# EAGLE board Audio_Blank (EAGLE 9.1.3)
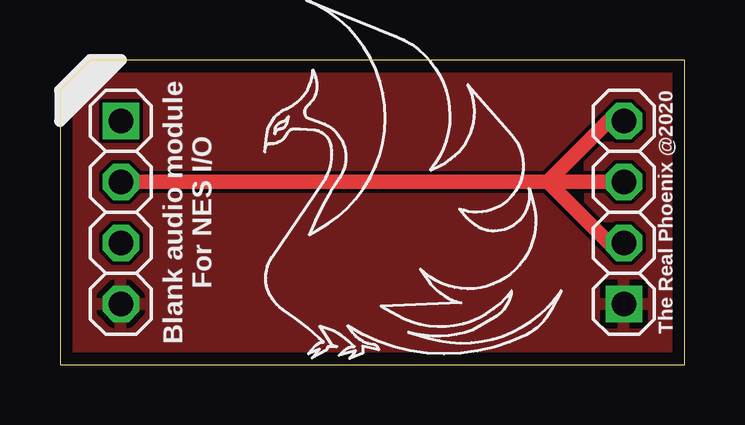
[diagram p0: board, top side]
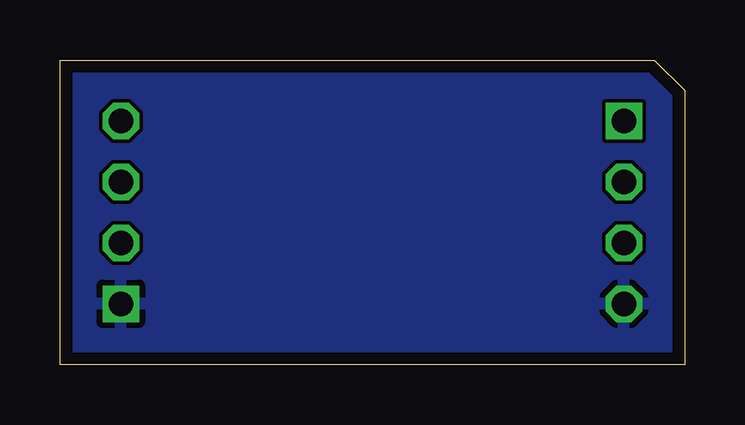
[diagram p1: board, bottom side, seen from below]

Size 26.04 x 12.7 mm. Coordinates in mm from the lower left corner, seen from the top.
Outline: 0,0 25.4,0 26.04,0 26.04,12.7 1.27,12.7 0,11.43 0,0
Copper layers (1*16): Top 0.035mm / dielectric 1.6mm / Bottom 0.035mm
Design rules "Elecrow_2-layer_PCB_eagle_rule": minimum track width 6mil, minimum drill 12mil, track to track 6mil, track to pad 6mil, pad to pad 6mil, via to via 8mil, smd to smd 0mil, copper to edge 20mil, drill to drill 10mil, minimum pad ring 6mil, minimum via ring 6mil, stop-mask expansion 0mil, vias tented up to drill 100mil, thermal gap 10mil

## Footprints (pad centres in the part's own frame; a part is rotated, then mirrored left to right if it is on the bottom)
1X04-S = drill 1.016 square: 1 -3.81,0 | drill 1.016 octagon: 2 -1.27,0; 3 1.27,0; 4 3.81,0

## Placement (x,y rotation side)
JP1  [1X04-S]  2.54,6.35 270 top
JP2  [1X04-S]  23.5,6.35 90 top
U$1  [LOGO]  5.08,-1.27 0 top

## Library data of the parts
JP1 JP2 = pinhead-2
U$1 = TRP_Custom

## Nets
GND: JP1.4 JP2.1
N$3: JP1.2 JP2.2 JP2.3 JP2.4
VCC: JP1.1

## Tracks (layer width: path | path; a pad name or v marks a point on that pad's centre or on a via)
GND
  pour Top: -1.27,13.97 27.94,13.97 27.94,-1.27 -1.27,-1.27
  pour Bottom: -1.27,13.97 27.94,13.97 27.94,-1.27 -1.27,-1.27
N$3
  Top 0.61: JP1.2 20.32,7.62 | 20.32,7.62 JP2.3 | JP2.4 22.86,10.16 20.32,7.62 | 20.32,7.62 22.86,5.08 JP2.2

## Text on the board
tNames: Blank audio module / For NES I/O | The Real Phoenix @2020